# Altium PCB ArtFire_Status.PcbDoc
Units mil, origin at the board's own origin, x right, y up, seen from the top; angles counter-clockwise.
Board outline 6000 x 4000 mil, 2 copper layers (Top Layer, Bottom Layer); 45 components, 7 nets, 152 pads, 4 vias.
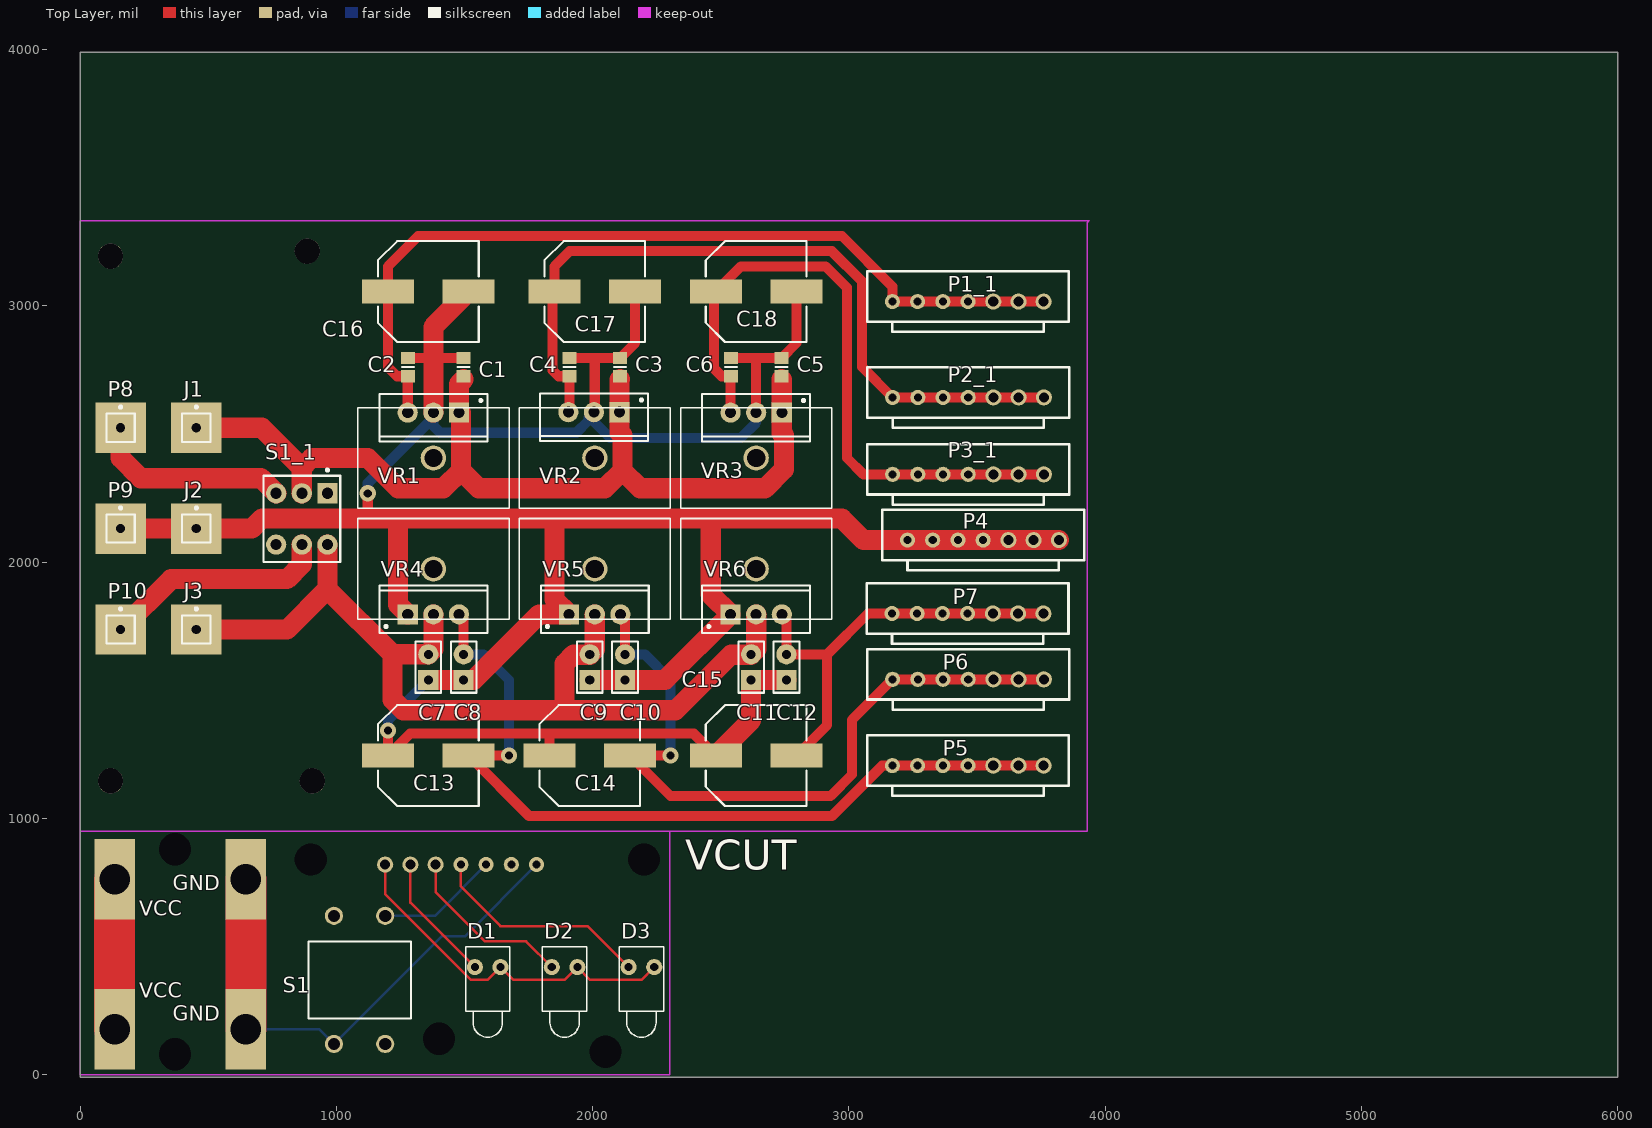
[diagram p0: Top Layer view]
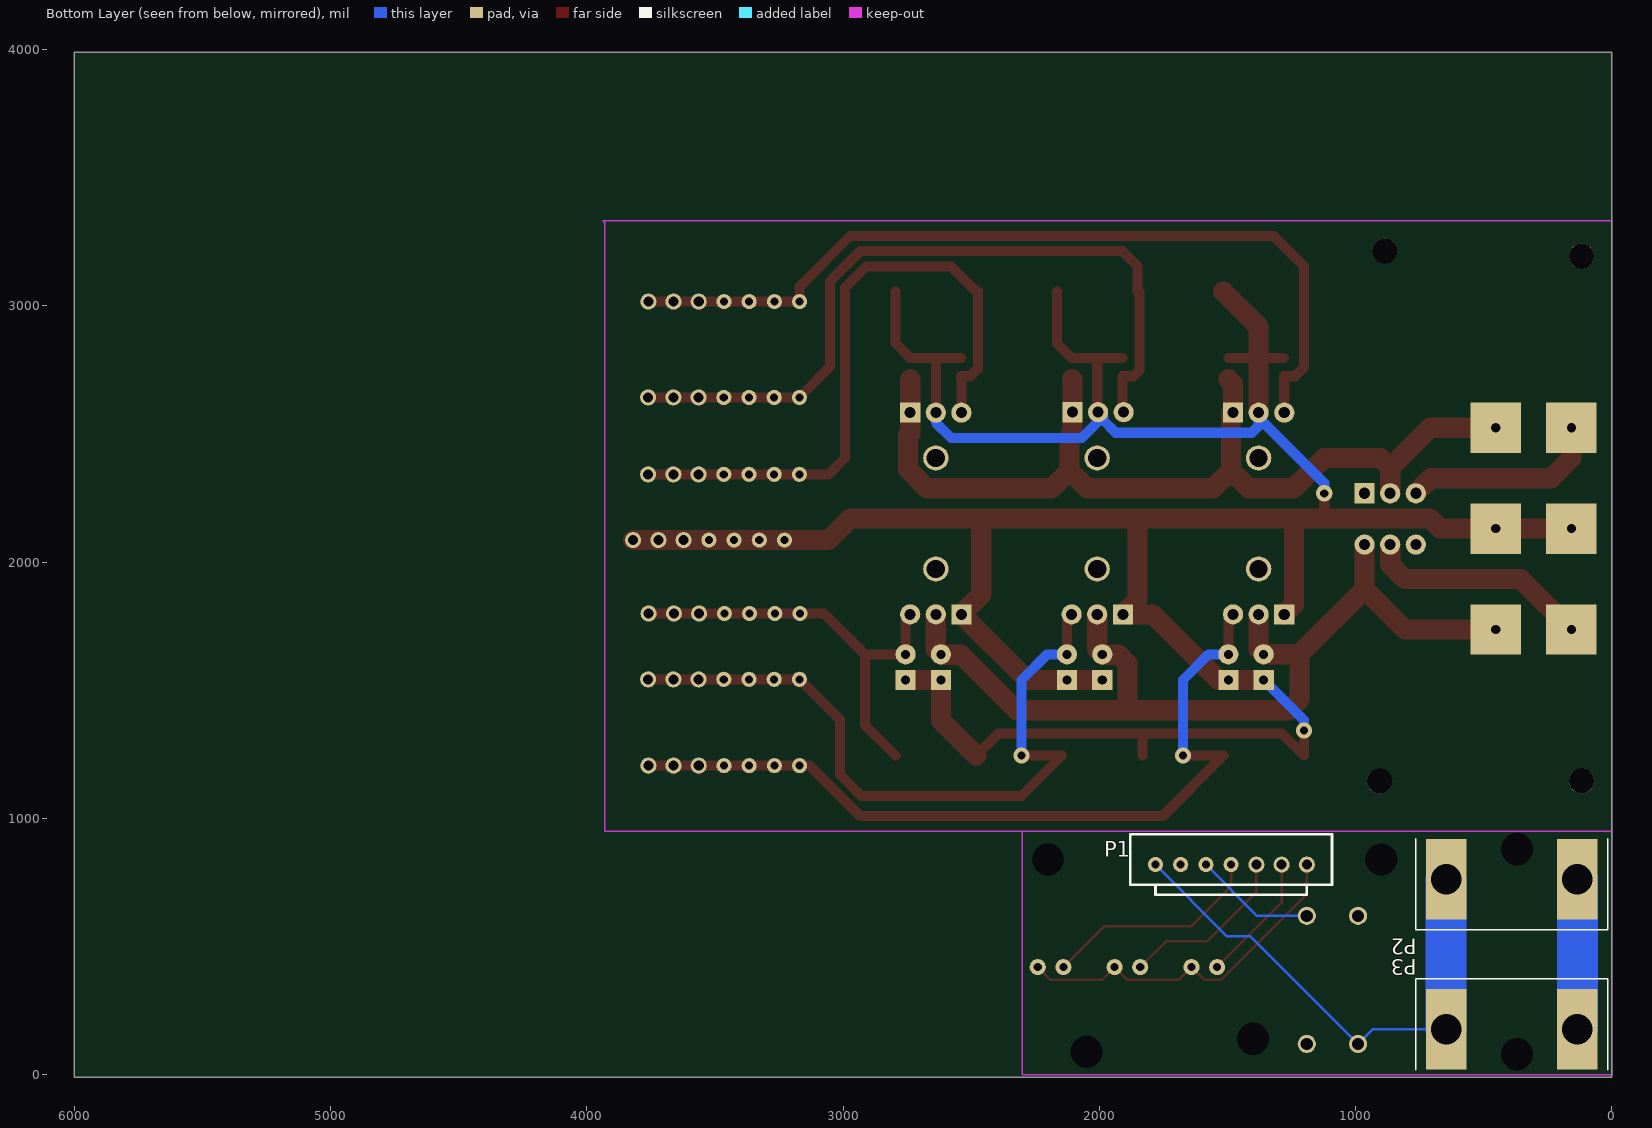
[diagram p1: Bottom Layer view, seen from below]

## Layer stack, top to bottom
Top Solder: solder mask 0.4, Solder Resist, Dk 3.5
Top Layer: signal copper 1.4
Dielectric 1: dielectric 12.6, FR-4, Dk 4.8
Bottom Layer: signal copper 1.4
Bottom Solder: solder mask 0.4, Solder Resist, Dk 3.5

## Board outline
0,-10 6000,-10 6000,3990 0,3990

## Design rules (kind name [scope] priority, off if disabled: settings)
Clearance [All] p1: gap=10
PolygonConnect [All] p1: connectstyle=Relief reliefconductorwidth=10 reliefentries=4 polygonreliefangle="90 Angle" airgapwidth=10
RoutingVias [All] p1: holewidth=28 width=50 viastyle="Through Hole" minholewidth=28 minwidth=50 maxholewidth=28 maxwidth=50
SolderMaskExpansion [All] p1: expansion=4
UnpouredPolygon [All] p1: allowunpoured=FALSE
Width [All] p1: maxlimit=1000 minlimit=10 preferedwidth=10
29 further rules are at their usual default settings.

## Classes and differential pairs
component class ArtFire_Status: D1 D2 D3 P1 S1

## Components (designator, comment, footprint, x,y, rotation, side; value= is the part's Value field where it differs from the comment)
C1 "Cap Semi" 6-0805_N 1496.06,2761.02 r90 top
C2 "Cap Semi" 6-0805_N 1279.53,2761.02 r90 top
C3 "Cap Semi" 6-0805_N 2106.3,2761.02 r90 top
C4 "Cap Semi" 6-0805_N 1909.45,2761.02 r90 top
C5 "Cap Semi" 6-0805_N 2736.22,2761.02 r90 top
C6 "Cap Semi" 6-0805_N 2539.37,2761.02 r90 top
C7 "Cap Pol1" HDR1X2 1358.27,1540.55 r90 top
C8 "Cap Pol1" HDR1X2 1496.06,1540.55 r90 top
C9 "Cap Pol1" HDR1X2 1988.19,1540.55 r90 top
C10 "Cap Pol1" HDR1X2 2125.98,1540.55 r90 top
C11 "Cap Pol1" HDR1X2 2618.11,1540.55 r90 top
C12 "Cap Pol1" HDR1X2 2755.91,1540.55 r90 top
C13 "Cap Pol1" CAP_10*10MM 1358.27,1245.28 r0 top
C14 "Cap Pol1" CAP_10*10MM 1988.19,1245.28 r0 top
C15 "Cap Pol1" CAP_10*10MM 2637.8,1245.28 r0 top
C16 "Cap Pol1" CAP_10*10MM 1358.27,3056.3 r0 top
C17 "Cap Pol1" CAP_10*10MM 2007.87,3056.3 r0 top
C18 "Cap Pol1" CAP_10*10MM 2637.8,3056.3 r0 top
D1 "RED" LED-1 1590,420 r270 top
D2 "YELLOW" LED-1 1890,420 r270 top
D3 "GREEN" LED-1 2190,420 r270 top
J1 "TB+" PIN1 452.76,2524.8 r0 top
J2 "GND" PIN1 452.76,2131.1 r0 top
J3 "TB-" PIN1 452.76,1737.4 r0 top
P1 "XH2.54-7P" XH2.54-7P 1190,820 r0 bottom
P1_1 "XH2.54-7P" XH2.54-7P 3759.84,3016.93 r180 top (schematic designator P1)
P2 "IN" ARTFIRE_SOURCE_CONNECTOR 390,920 r270 bottom
P2_1 "XH2.54-7P" XH2.54-7P 3760.63,2643 r180 top (schematic designator P2)
P3 "IN" ARTFIRE_SOURCE_CONNECTOR 390,20 r90 bottom
P3_1 "XH2.54-7P" XH2.54-7P 3760.63,2343 r180 top (schematic designator P3)
P4 "XH2.54-7P" XH2.54-7P 3818.9,2086.3 r180 top
P5 "XH2.54-7P" XH2.54-7P 3759.84,1205.91 r180 top
P6 "XH2.54-7P" XH2.54-7P 3760.63,1543 r180 top
P7 "XH2.54-7P" XH2.54-7P 3758.27,1799.69 r180 top
P8 "B+" PIN1 157.48,2524.8 r0 top
P9 "Plug" PIN1 157.48,2131.1 r0 top
P10 "B-" PIN1 157.48,1737.4 r0 top
S1 "SW-PB" KEY_B 1290,120 r90 top
S1_1 "SW_DPDT" SW-DPDT 964.57,2268.9 r270 top (schematic designator S1)
VR1 "7812" TO220 1377.95,2583.86 r180 top
VR2 "7809" TO220 2004.72,2585.52 r180 top
VR3 "7805" TO220 2637.8,2583.86 r180 top
VR4 "7912" TO220 1377.95,1796.46 r0 top
VR5 "7909" TO220 2007.87,1796.46 r0 top
VR6 "7905" TO220 2637.8,1796.46 r0 top

## Footprints (in the part's own frame and the unit in brackets; to place one, negate y for a bottom-side part, rotate by r counter-clockwise, add the part's x,y. Pads: shape width x height; smd on the part's side, far side on the other; paste and mask are expansions set on the pad)
6-0805_N [mm] "Chip Resistor, Body 2.0x1.2mm, IPC Medium Density"
  rect 1.2x1.4 smd: 1(-0.9,0) 2(0.9,0)
  silkscreen extent 0,-0.6 0,0.6, body extent -1.07,-0.7 1.07,0.7, height 0.7
ARTFIRE_SOURCE_CONNECTOR [mm]
  rect 8x4 hole 3: 1(4,6.5) 2(4,-6.5)
  silkscreen extent 0,-9.5 9,9.5
CAP_10*10MM [mm]
  rect 5.15x2.35 smd: 1(-4,0) 2(4,0)
  silkscreen extent -5,-5 5,5, body extent -5,-5 5,5, height 10
HDR1X2 [mm] "Connector; Header; 2 Position"
  rect 2x2 hole 0.9: 1(0,0)
  round 2 hole 0.9: 2(2.54,0)
  silkscreen extent -1.27,-1.27 3.81,1.27
KEY_B [mm]
  round 1.8 hole 1.2: 1(0,7.62) 2(12.7,2.54) 3(12.7,7.62) 4(0,2.54)
  silkscreen extent 2.54,0 10.16,10.16
LED-1 [mm] "LED; 2 Leads"
  round 1.6 hole 0.8: 1(0,1.27) 2(0,-1.27)
  silkscreen extent -2,-2.2 6.95,2.2
PIN1 [mm] "Connector; Plug"
  rect 5x5 hole 0.9: 1(0,0)
  silkscreen extent -1.4,-1.4 1.4,2.17
SW-DPDT [mm]
  rect 2x2 hole 1.1: 1(0,0)
  round 2 hole 1.1: 2(0,-5.08) 3(0,-2.54) 4(5.08,-5.08) 5(5.08,-2.54) 6(5.08,0)
  silkscreen extent -2.42,-6.35 6.82,1.27
TO220 [mm] "TO, Thru-Hole, Vertical, Heatsink Mounted; 3 In-Line Leads; Pitch 2.54 mm"
  rect 2x2 hole 1.1: 1(-2.54,0)
  round 2 hole 1.1: 2(0,0) 3(2.54,0)
  silkscreen extent -5.35,-1.85 5.35,2.85, body extent -5.4,-1.9 5.4,2.9, height 22.9
XH2.54-7P [mm]
  round 1.6 hole 1: 1(0,0) 2(2.5,0) 3(5,0)
  round 1.5 hole 0.8: 4(7.5,0) 5(10,0) 6(12.5,0) 7(15,0)
  silkscreen extent -2.5,-3 17.5,3

## Part data
C1 C2 C3 C4 C5 C6: "Capacitor (Semiconductor SIM Model)"
C7 C8 C9 C10 C11 C12 C13 C14 C15 C16 C17 C18: "Polarized Capacitor (Radial)"
D1 D2 D3: library part LED1, "Typical RED GaAs LED"
J1 J2 J3: library part Socket, "Socket"
P2 P3: library part "Header 2", "Header, 2-Pin"
P8 P10: library part Plug, "Plug"
S1: "Switch"
VR1 VR2 VR3 VR4 VR5 VR6: library part "Volt Reg", "Voltage Regulator"

## Free pads (board coordinates)
  round 98.43 hole 98.43: 0(118.11,3194.09) 1(885.83,3213.78) 2(118.11,1146.85) 3(905.51,1146.85)
  round 100 hole 125.98: 0(370,80) 0(370,880) 0(900,840) 0(1400,140) 0(2050,90) 0(2200,840)
  round 98.43 hole 70.87: 0(1377.95,1973.62) 0(1377.95,2406.69) 0(2007.87,1973.62) 0(2007.87,2406.69) 0(2637.8,1973.62) 0(2637.8,2406.69)

## Via types
v1: diameter 62.99, hole 31.5, Top Layer to Bottom Layer, tented both sides, 4 vias

## Nets (pads, with @x,y where several pads share a name; then routed paths per layer and width w, separated by ;. In a path a pad name is that pad's centre, name@x,y a point inside that pad or via, vN(x,y) a via of type N, cw(c..) or ccw(c..) an arc to the next point about the centre after c; other vN are vias at no path point)
+5V: D1.1 D2.1 D3.1 P1.1 | length 1407.8
  Top Layer w10: P1.1 1190,704.24 1524.24,370 1590,370 D1.1 1690,370 1890,370 D2.1 1990,370 2190,370 D3.1
GND: P1.7 P2.2 P3.1 S1.1 | length 2618.5
  Top Layer w160: P3.1 P2.2
  Bottom Layer w10: P3.1 932.52,177.48 S1.1 1410,540 1500.55,540 P1.7
  Bottom Layer w160: P3.1 P2.2
NetD1_2: D1.2 P1.2 | length 504.2
  Top Layer w10: P1.2 1288.43,671.57 D1.2
NetD2_2: D2.2 P1.3 | length 681.4
  Top Layer w10: P1.3 1386.85,713.15 1580,520 1740,520 D2.2
NetD3_2: D3.2 P1.4 | length 870.4
  Top Layer w10: P1.4 1485.28,734.72 1640,580 1980,580 D3.2
NetP1_5: P1.5 S1.2 | length 476.5
  Bottom Layer w10: S1.2 1383.7,620 P1.5
NetP2_1: P2.1 P3.2 | length 1170.1
  Top Layer w160: P3.2 P2.1
  Bottom Layer w160: P3.2 P2.1
pads on no net: C1.1 C1.2 C2.1 C2.2 C3.1 C3.2 C4.1 C4.2 C5.1 C5.2 C6.1 C6.2 C7.1 C7.2 C8.1 C8.2 C9.1 C9.2 C10.1 C10.2 C11.1 C11.2 C12.1 C12.2 C13.1 C13.2 C14.1 C14.2 C15.1 C15.2 C16.1 C16.2 C17.1 C17.2 C18.1 C18.2 J1.1 J2.1 J3.1 P1.6 P1_1.1 P1_1.2 P1_1.3 P1_1.4 P1_1.5 P1_1.6 P1_1.7 P2_1.1 P2_1.2 P2_1.3 P2_1.4 P2_1.5 P2_1.6 P2_1.7 P3_1.1 P3_1.2 P3_1.3 P3_1.4 P3_1.5 P3_1.6 P3_1.7 P4.1 P4.2 P4.3 P4.4 P4.5 P4.6 P4.7 P5.1 P5.2 P5.3 P5.4 P5.5 P5.6 P5.7 P6.1 P6.2 P6.3 P6.4 P6.5 P6.6 P6.7 P7.1 P7.2 P7.3 P7.4 P7.5 P7.6 P7.7 P8.1 P9.1 P10.1 S1.3 S1.4 S1_1.1 S1_1.2 S1_1.3 S1_1.4 S1_1.5 S1_1.6 VR1.1 VR1.2 VR1.3 VR2.1 VR2.2 VR2.3 VR3.1 VR3.2 VR3.3 VR4.1 VR4.2 VR4.3 VR5.1 VR5.2 VR5.3 VR6.1 VR6.2 VR6.3
copper on no net: | length 38514.5
  Top Layer w39.37: 1102.36,2170.47 1122.05,2190.16 v1(1122.05,2268.9) ; v1(1200.79,1343.7) 1200.79,1245.28 1286.42,1330.91 1830.71,1330.91 ; 1277.95,2583.86 1277.95,2724.02 1279.53,2725.59 1236.22,2725.59 1200.79,2761.02 1200.79,3056.3 1200.79,3154.72 1318.9,3272.83 2972.44,3272.83 3169.29,3075.98 3169.29,3016.93 3267.72,3016.93 3366.14,3016.93 3464.57,3016.93 3562.99,3016.93 3661.42,3016.93 3759.84,3016.93 ; 1279.53,2796.46 1377.95,2796.46 1496.06,2796.46 ; 1477.95,1796.46 1496.06,1778.35 1496.06,1640.55 ; v1(1673.23,1245.28) 1515.75,1245.28 1751.97,1009.06 2933.07,1009.06 3129.92,1205.91 3169.29,1205.91 3267.72,1205.91 3366.14,1205.91 3464.57,1205.91 3562.99,1205.91 3661.42,1205.91 3759.84,1205.91 ; 1830.71,1245.28 1830.71,1330.91 ; 1904.72,2585.52 1909.45,2590.24 1909.45,2725.59 1866.14,2725.59 1842.52,2749.21 1842.52,3056.3 1850.39,3056.3 1850.39,3154.72 1909.45,3213.78 2933.07,3213.78 3051.18,3095.67 3051.18,2761.89 3170.08,2643 3268.5,2643 3366.93,2643 3465.35,2643 3563.78,2643 3662.2,2643 3760.63,2643 ; 1909.45,2796.46 2007.87,2796.46 ; 2007.87,2588.67 2007.87,2796.46 ; 2107.87,1796.46 2125.98,1778.35 2125.98,1640.55 ; 2165.35,3056.3 2165.35,2855.51 2106.3,2796.46 2007.87,2796.46 ; v1(2303.15,1245.28) 2145.67,1245.28 2303.15,1087.8 2928.29,1087.8 3011.81,1171.31 3011.81,1384.73 3170.08,1543 3268.5,1543 3366.93,1543 3465.35,1543 3563.78,1543 3662.2,1543 3760.63,1543 ; 2480.31,1245.28 2394.68,1330.91 1830.71,1330.91 ; 2537.8,2583.86 2537.8,2724.02 2539.37,2725.59 2503.38,2725.59 2472.44,2756.53 2472.44,3056.3 2480.31,3056.3 2578.74,3154.72 2908.61,3154.72 2992.13,3071.21 2992.13,2406.69 3055.82,2343 3170.08,2343 3268.5,2343 3366.93,2343 3465.35,2343 3563.78,2343 3662.2,2343 3760.63,2343 ; 2539.37,2796.46 2736.22,2796.46 2795.28,2855.51 2795.28,3056.3 ; 2637.8,2583.86 2637.8,2796.46 ; 2737.8,1796.46 2755.91,1778.35 2755.91,1640.55 2914.96,1640.55 ; 2795.28,1245.28 2914.96,1364.96 2914.96,1640.55 ; 3758.27,1799.69 3659.84,1799.69 3561.42,1799.69 3462.99,1799.69 3364.57,1799.69 3266.14,1799.69 3167.72,1799.69 3074.1,1799.69 2914.96,1640.55
  Top Layer w78.74: 157.48,1737.4 354.33,1934.25 807.09,1934.25 864.57,1991.73 864.57,2068.9 ; 157.48,2131.1 452.76,2131.1 669.29,2131.1 708.66,2170.47 1102.36,2170.47 1240.16,2170.47 ; 157.48,2524.8 157.48,2406.69 236.22,2327.95 705.51,2327.95 764.57,2268.9 ; 452.76,1737.4 807.09,1737.4 964.57,1894.88 ; 452.76,2524.8 708.66,2524.8 864.57,2368.9 ; 864.57,2268.9 864.57,2368.9 ; 964.57,2068.9 964.57,1894.88 ; 1277.95,1796.46 1240.16,1834.25 1240.16,2170.47 ; 1358.27,1540.55 1496.06,1540.55 1535.26,1540.55 1791.16,1796.46 1907.87,1796.46 1850.39,1853.94 1850.39,2150.79 1870.08,2170.47 ; 1377.95,1796.46 1377.95,1660.24 1358.27,1640.55 1218.9,1640.55 ; 1377.95,2583.86 1377.95,2796.46 1377.95,2918.5 1515.75,3056.3 ; 1496.06,2713.78 1477.95,2695.67 1477.95,2583.86 1486.22,2583.86 1486.22,2357.48 ; 1870.08,1422.44 1889.76,1442.13 1889.76,1604.38 1924.36,1638.98 1988.19,1638.98 1988.19,1640.55 2007.87,1660.24 2007.87,1796.46 ; 1988.19,1540.55 2125.98,1540.55 2281.89,1540.55 2537.8,1796.46 2460.63,1873.62 2460.63,2170.47 ; 2106.3,2713.78 2104.72,2712.2 2104.72,2585.52 2104.72,2506.69 2116.14,2495.28 2116.14,2357.48 ; 2480.31,1245.28 2618.11,1383.07 2618.11,1540.55 2755.91,1540.55 ; 2637.8,1796.46 2637.8,1660.24 2618.11,1640.55 2616.54,1638.98 2539.37,1638.98 2322.83,1422.44 1259.84,1422.44 1218.9,1463.39 1218.9,1640.55 ; 2736.22,2713.78 2737.8,2712.2 2737.8,2583.86 2737.8,2503.54 2746.06,2495.28 2746.06,2361.85 2672.8,2288.58 2185.04,2288.58 2116.14,2357.48 ; 3818.9,2086.3 3720.47,2086.3 3622.05,2086.3 3523.62,2086.3 3425.2,2086.3 3326.77,2086.3 3228.35,2086.3 3056.61,2086.3 2972.44,2170.47 2460.63,2170.47 ; 864.57,2368.9 902.36,2406.69 1122.05,2406.69 1240.16,2288.58 1417.32,2288.58 1486.22,2357.48 ; 964.57,1894.88 1218.9,1640.55 ; 1240.16,2170.47 1870.08,2170.47 ; 1486.22,2357.48 1555.12,2288.58 2047.24,2288.58 2116.14,2357.48 ; 1870.08,2170.47 2460.63,2170.47
  Bottom Layer w39.37: v1(1122.05,2268.9) 1122.05,2308.27 1377.95,2564.17 ; v1(1200.79,1343.7) 1200.79,1383.07 1358.27,1540.55 ; 1377.95,2583.86 1377.95,2564.17 ; 1496.06,1640.55 1573.23,1640.55 1673.23,1540.55 v1(1673.23,1245.28) ; 2125.98,1640.55 2203.15,1640.55 2303.15,1540.55 v1(2303.15,1245.28) ; 2637.8,2583.86 2637.8,2544.49 2578.74,2485.43 2066.93,2485.43 2004.72,2547.64 2004.72,2585.52 1983.46,2564.26 1983.46,2552.9 1935.68,2505.12 1404.8,2505.12 1377.95,2531.97 1377.95,2564.17

## Keep-outs
Keep-Out Layer:
  lines w6: 2300,950 2300,0 0,0 0,950 ; 0,950 3930,950 3930,3324.88 3937.01,3331.89 0,3331.89 0,950

## Silkscreen, mask and mechanical layers (free items; w line width, h text height)
Top Overlay:
  lines w6: 1082.68,1776.77 1673.23,1776.77 1673.23,2170.47 1082.68,2170.47 1082.68,1776.77 ; 1082.68,2209.84 1673.23,2209.84 1673.23,2603.54 1082.68,2603.54 1082.68,2209.84 ; 1712.6,1776.77 1712.6,2170.47 2303.15,2170.47 2303.15,1776.77 1712.6,1776.77 ; 1712.6,2209.84 2303.15,2209.84 2303.15,2603.54 1712.6,2603.54 1712.6,2209.84 ; 2342.52,1776.77 2342.52,2170.47 2933.07,2170.47 2933.07,1776.77 2342.52,1776.77 ; 2342.52,2209.84 2933.07,2209.84 2933.07,2603.54 2342.52,2603.54 2342.52,2209.84
  text "VCUT" at 2360,760 h200
  text "GND" at 360,700 h100
  text "VCC" at 230,600 h100
  text "VCC" at 230,280 h100
  text "GND" at 360,190 h100